# Altium PCB f2.PcbDoc (part 1 of 2)
Units mil, origin at the board's own origin, x right, y up, seen from the top; angles counter-clockwise.
Board outline 2023.27 x 874.02 mil, 6 copper layers (Top Layer, layer2, flex_top, flex_bottom, layer5, Bottom Layer), stack 57.4 mil thick; 105 components, 82 nets, 465 pads, 108 vias.
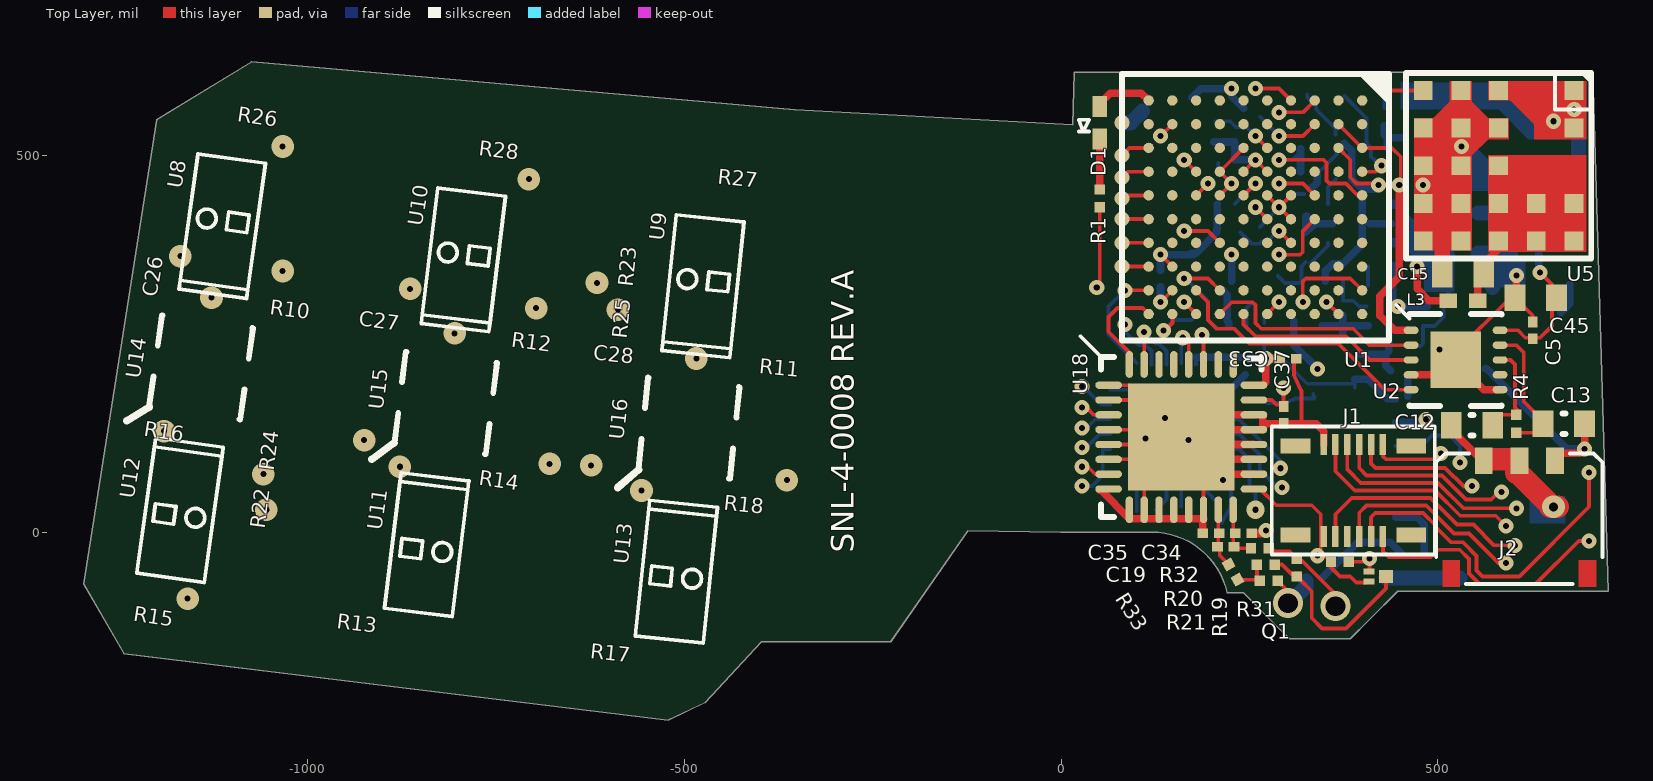
[diagram p0: Top Layer view]
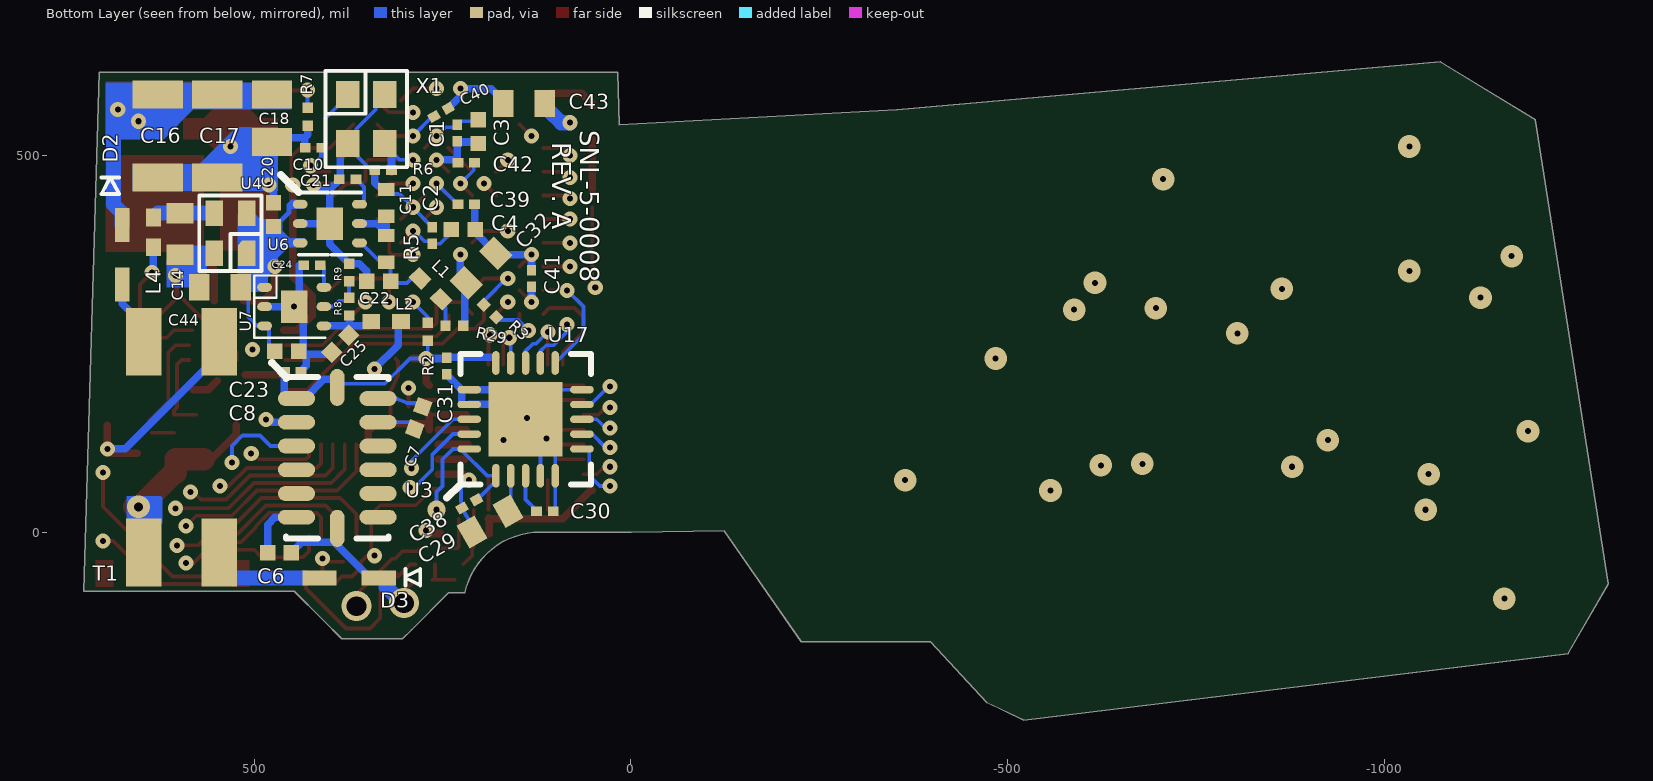
[diagram p1: Bottom Layer view, seen from below]
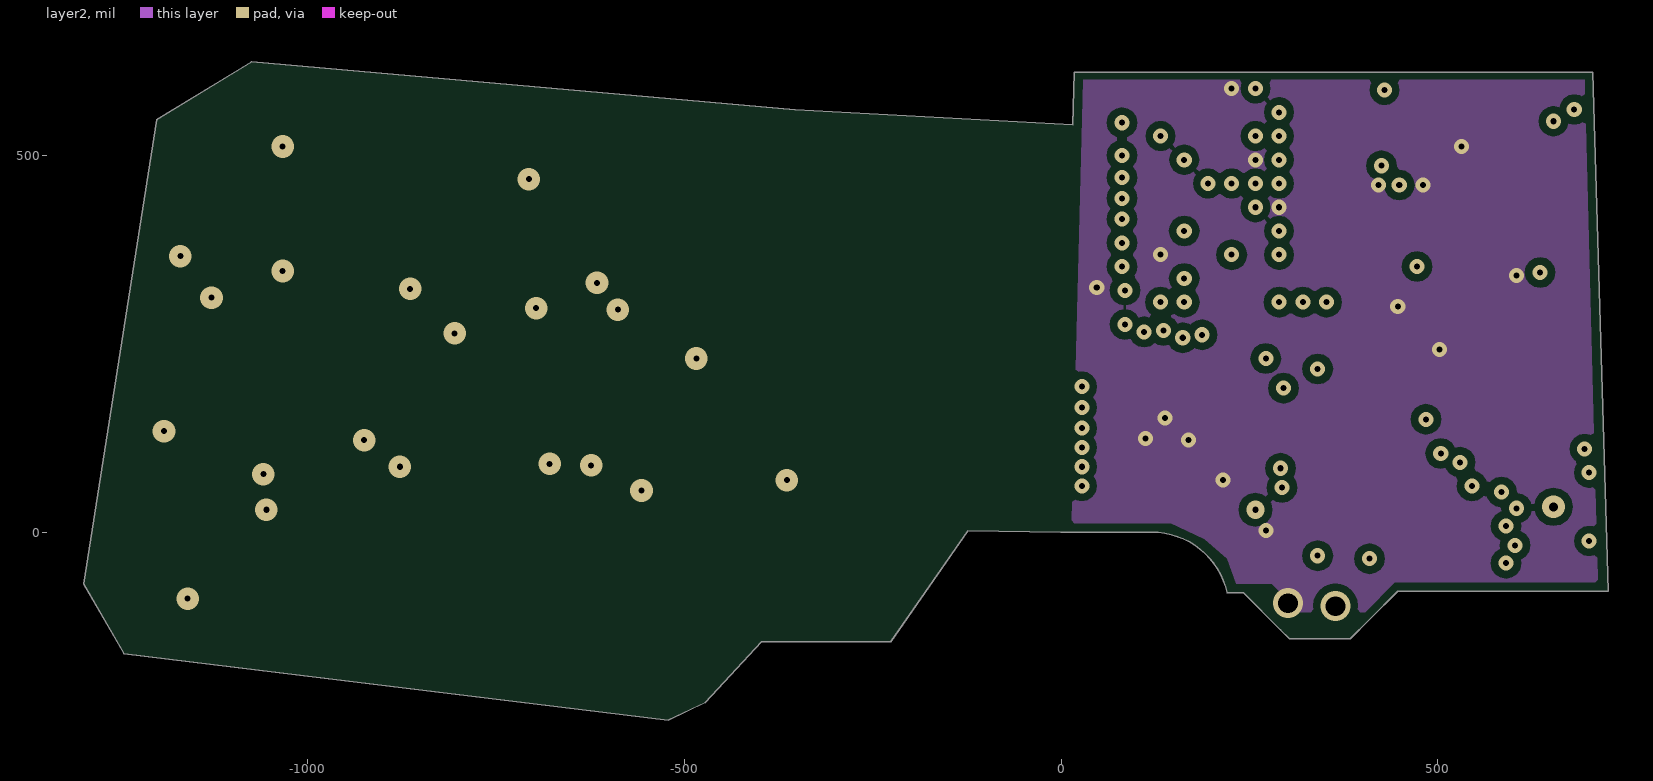
[diagram p2: layer2]
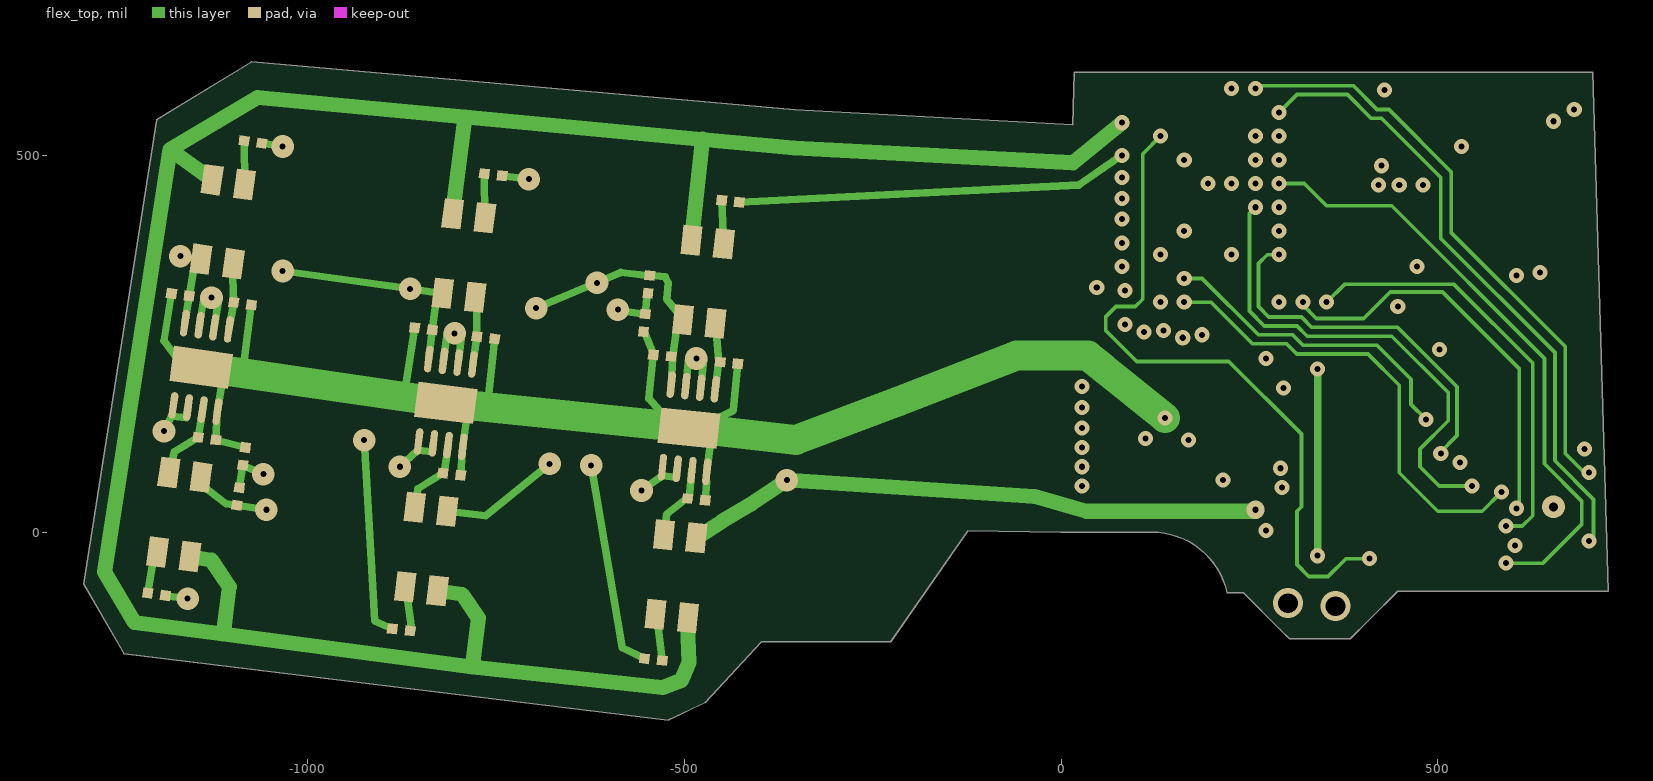
[diagram p3: flex_top]
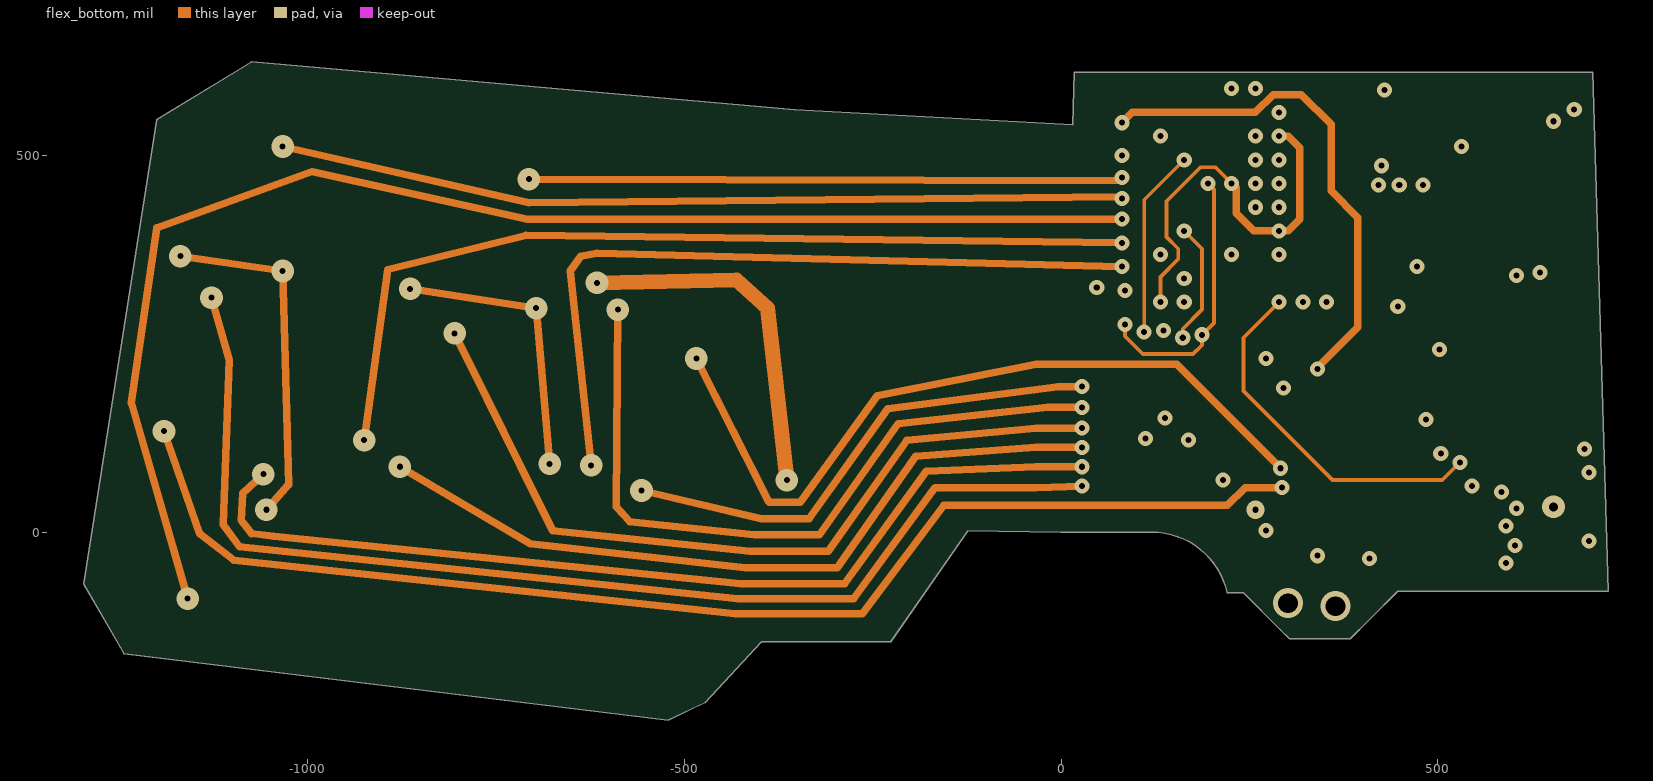
[diagram p4: flex_bottom]
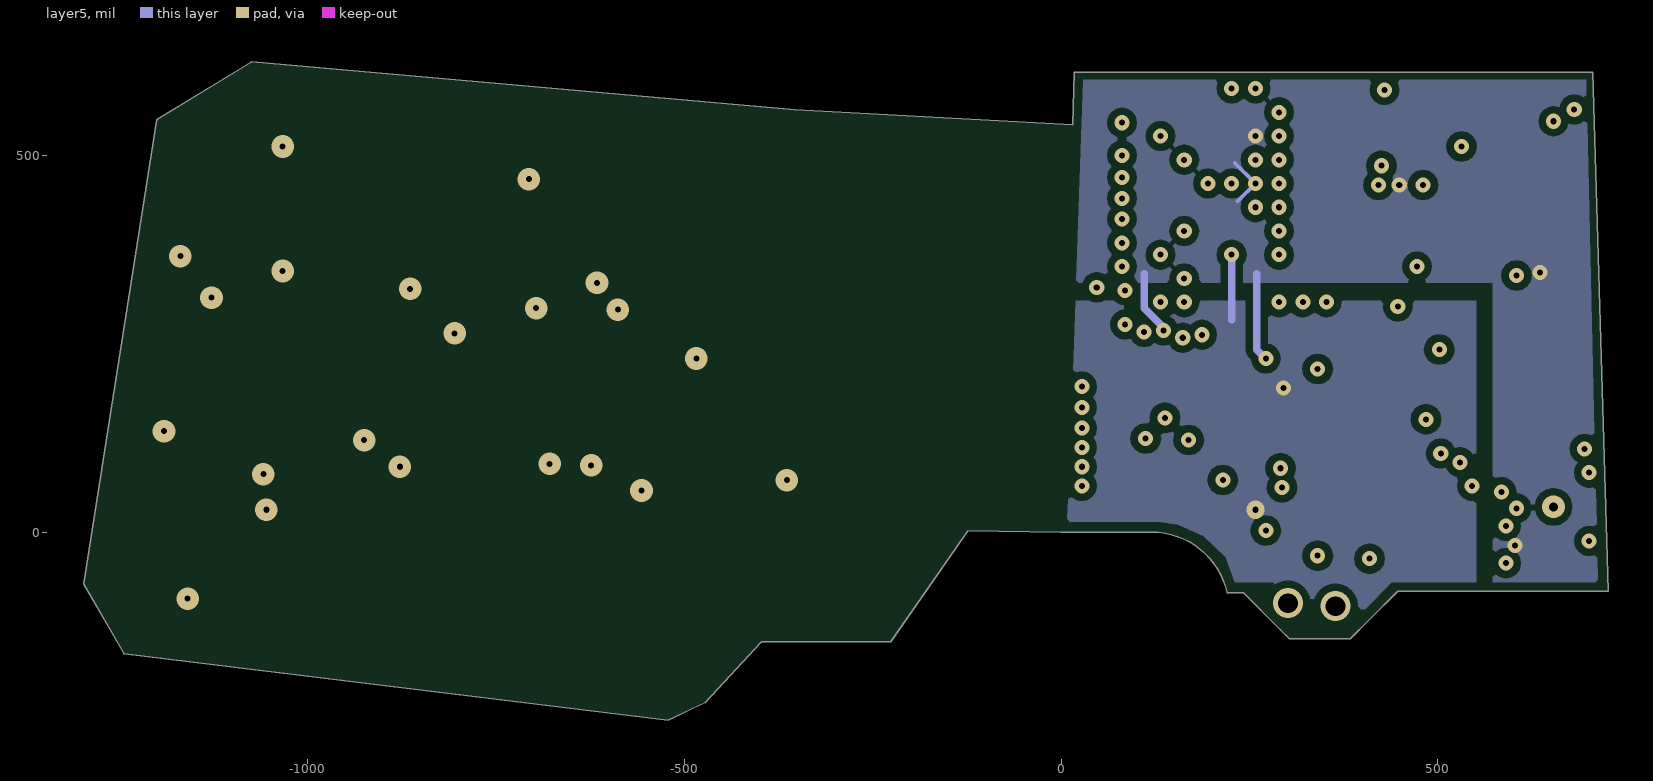
[diagram p5: layer5]

## Layer stack, top to bottom
Top Layer: signal copper 1.4
Dielectric: core 15.5, FR-4, Dk 4.8
layer2: signal copper 1.4
Dielectric: prepreg 3.4, FR-4, Dk 4.8
flex_top: signal copper 0.7
Dielectric: core 12.6, FR-4, Dk 4.8
flex_bottom: signal copper 0.7
Dielectric: prepreg 3.4, FR-4, Dk 4.8
layer5: signal copper 1.4
Dielectric: core 15.5, FR-4, Dk 4.8
Bottom Layer: signal copper 1.4

## Board outline
-1244.09,-161.42 -521.65,-250 -472.44,-226.38 -397.64,-145.67 -226.38,-145.67 -123.81,1.47 -0.8,-0.23 120.3,-0.23 cw(c120.32,-102.7) 220.4,-80.72 220.47,-80.71 242.13,-80.71 291.34,-129.92 303.15,-141.73 383.86,-141.73 409.45,-116.14 446.85,-78.74 726.03,-78.94 705.57,610.01 17.32,610.01 15.25,540.3 -353.27,560.41 -1074.8,624.02 -1200.79,547.24 -1297.24,-68.9

## Design rules (kind name [scope] priority, off if disabled: settings)
Clearance Clearance_layer2__gnd [InNamedPolygon('layer2__gnd')] p1: gap=10
Clearance Clearance_layer5__3v3 [InNamedPolygon('layer5__3v3')] p2: gap=10
Clearance Clearance_layer5__4v7 [InNamedPolygon('layer5__4v7')] p3: gap=10
Clearance [All] p4: gap=5
ComponentClearance [All] p1: gap=1 collisioncheckmode=3 verticalgap=1 showdistances=FALSE
MinimumSolderMaskSliver [All] p1: minsoldermaskwidth=1
PasteMaskExpansion [All] p1: expansion=-1
PolygonConnect [All] p1: connectstyle=Direct reliefconductorwidth=10 reliefentries=4 polygonreliefangle="90 Angle" airgapwidth=10
RoutingVias [All] p1: holewidth=8 width=20 viastyle="Through Hole" minholewidth=8 minwidth=20 maxholewidth=28 maxwidth=40
SilkToSilkClearance [All] p1: silktosilkclearance=1
SilkscreenOverComponentPads [All] p1: minsilkscreentomaskgap=1
SolderMaskExpansion [All] p1: expansion=3
Width [All] p1: maxlimit=40 minlimit=5 preferedwidth=5
23 further rules are at their usual default settings.

## Classes and differential pairs
component class analog: C26 C27 C28 C29 C30 C31 C37 R10 R11 R12 R13 R14 R15 R16 R17 R18 R26 R27 R28 U8 U9 U10 U11 U12 U13 U14 U15 U16 U17
component class mcu: C1 C2 C3 C4 C5 C6 C7 C8 C10 C11 C39 C40 C41 C42 D1 J1 R1 R2 R3 U1 U2 U3 X1
component class bias_tee: C12 C13 C14 C15 C16 C17 C18 C20 C21 C22 C23 C24 C25 C32 C43 C44 C45 D2 D3 J2 L1 L2 L3 L4 R4 R5 R6 R7 R8 R9 R29 T1 U4 U5 U6 U7
component class strain: C19 C33 C34 C35 C38 Q1 R19 R20 R21 R22 R23 R24 R25 R31 R32 R33 U18

## Components (designator, comment, footprint, x,y, rotation, side; value= is the part's Value field where it differs from the comment)
C1 "CAP 100nF 6.3V 0201(0603)" CAPC0201(0603)33_L 230.32,529.53 r90 bottom
C2 "CAP 100nF 6.3V 0201(0603)" CAPC0201(0603)33_L 263.78,393.7 r270 bottom
C3 "CAP 2.2uF 10V 0402(1005)" CAPC0402(1005)60_L 202.76,531.5 r90 bottom
C4 "CAP 2.2uF 10V 0402(1005)" CAPC0402(1005)60_L 222.44,401.57 r0 bottom
C5 "CAP 100nF 6.3V 0201(0603)" CAPC0201(0603)33_L 625.98,267.72 r90 top
C6 "CAP 4.7uF 6.3V 0402(1005)" CAPC0402(1005)60_L 466.54,-27.56 r0 bottom
C7 "CAP 220nF 16V 0402(1005)" CAPC0402(1005)60_L 281.5,151.57 r110 bottom
C8 "CAP 100nF 6.3V 0201(0603)" CAPC0201(0603)33_L 448.82,212.6 r0 bottom
C10 "CAP 10pF 10V 0201(0603)" CAPC0201(0603)33_L 421.26,509.84 r180 bottom
C11 "CAP 10pF 10V 0201(0603)" CAPC0201(0603)33_L 328.74,480.31 r180 bottom
C12 "CAP 1uF 50V 0603(1608)" CAPC0603(1608)100_L 545.28,141.73 r0 top
C13 "CAP 1uF 50V 0603(1608)" CAPC0603(1608)100_L 667.32,143.7 r180 top
C14 "CAP 10uF 10V 0603(1608)" CAPC0603(1608)100_L 598.43,395.67 r90 bottom
C15 "CAP 10uF 10V 0603(1608)" CAPC0603(1608)100_L 533.46,342.52 r0 top
C16 "CAP 10uF 50V 1206(3216)" CAPC1206(3216)190_L 627.95,525.59 r90 bottom
C17 "CAP 10uF 50V 1206(3216)" CAPC1206(3216)190_L 549.21,525.59 r90 bottom
C18 "CAP 2.2uF 50V 0805(2012)" CAPC0805(2012)145_L 476.38,549.21 r270 bottom
C19 "CAP 100nF 10V 0201(0603)" CAPC0201(0603)33_L 218.5,-19.69 r180 top
C20 "CAP 1uF 10V 0402(1005)" CAPC0402(1005)60_L 474.41,421.26 r270 bottom
C21 "CAP 100nF 10V 0201(0603)" CAPC0201(0603)33_L 375.98,468.5 r180 bottom
C22 "CAP 2.2uF 10V 0402(1005)" CAPC0402(1005)60_L 334.65,332.68 r180 bottom
C23 "CAP 1uF 10V 0402(1005)" CAPC0402(1005)60_L 456.69,240.16 r0 bottom
C24 "CAP 100nF 10V 0201(0603)" CAPC0201(0603)33_L 423.23,354.33 r180 bottom
C25 "CAP 2.2uF 10V 0402(1005)" CAPC0402(1005)60_L 385.83,250 r135 bottom
C26 "CAP 100nF 10V 0201(0603)" FLEX_0201 -1169.29,314.96 r352 top
C27 "CAP 100nF 10V 0201(0603)" FLEX_0201 -846.46,269.69 r353 top
C28 "CAP 100nF 10V 0201(0603)" FLEX_0201 -529.53,234.25 r354 top
C29 "CAP 10uF 10V 0603(1608)" CAPC0603(1608)100_L 187.01,13.78 r150 bottom
C30 "CAP 100nF 10V 0201(0603)" CAPC0201(0603)33_L 114.17,27.56 r0 bottom
C31 "CAP 100nF 10V 0201(0603)" CAPC0201(0603)33_L 244.09,220.47 r90 bottom
C32 "CAP 10uF 10V 0603(1608)" CAPC0603(1608)100_L 198.82,350.39 r315 bottom
C33 "CAP 100nF 10V 0201(0603)" CAPC0201(0603)33_L 301.18,230.31 r180 top
C34 "CAP 10nF 10V 0201(0603)" CAPC0201(0603)33_L 242.13,-1.97 r180 top
C35 "CAP 10nF 10V 0201(0603)" CAPC0201(0603)33_L 198.82,-1.97 r0 top
C37 "CAP 100nF 10V 0201(0603)" CAPC0201(0603)33_L 295.28,155.51 r90 top
C38 "CAP 100nF 10V 0201(0603)" CAPC0201(0603)33_L 214.57,37.4 r150 bottom
C39 "CAP 100nF 6.3V 0201(0603)" CAPC0201(0603)33_L 218.5,435.04 r0 bottom
C40 "CAP 100nF 6.3V 0201(0603)" CAPC0201(0603)33_L 251.97,557.09 r330 bottom
C41 "CAP 100nF 6.3V 0201(0603)" CAPC0201(0603)33_L 131.89,336.61 r270 bottom
C42 "CAP 100nF 6.3V 0201(0603)" CAPC0201(0603)33_L 218.5,490.16 r180 bottom
C43 "CAP 10uF 10V 0603(1608)" CAPC0603(1608)100_L 141.73,568.9 r180 bottom
C44 "CAP 10uF 10V 0603(1608)" CAPC0603(1608)100_L 545.28,324.8 r180 bottom
C45 "CAP 10uF 10V 0603(1608)" CAPC0603(1608)100_L 629.92,311.02 r0 top
D1 "LED2" DIOM1005X05L 51.18,543.31 r270 top
D2 "Diode" SOD-323F 675.2,368.11 r90 bottom
D3 "Diode" SOD-323F 374.02,-61.02 r0 bottom
J1 "" MOLEX-51338-9974 387.8,55.12 r270 top
J2 "JST_ACH_3" JST_ACH_3 608.27,76.77 r90 top
L1 "Inductor" 0402-A 265.75,322.83 r225 bottom
L2 "Inductor" 0402-A 324.8,279.53 r180 bottom
L3 "Inductor" 0402-A 533.46,307.09 r180 top
L4 "Inductor" 0402-A 633.86,397.64 r270 bottom
Q1 "MOSFET-P" diodes_inc_dfn_0806 415.35,-59.06 r270 top
R1 "330R 5% 0201(0603)" RESC0201(0603)_L 51.18,442.91 r90 top
R2 "10K 1% 0201(0603)" RESC0201(0603)_L 269.69,265.75 r270 bottom
R3 "10K 1% 0201(0603)" RESC0201(0603)_L 187.01,293.31 r225 bottom
R4 "120R 5% 0201(0603)" RESC0201(0603)_L 604.33,143.7 r270 top
R5 "180K 1% 0402(1005)" RESC0402(1005)_L 324.8,375.98 r270 bottom
R6 "64K9 1% 0402(1005)" RESC0402(1005)_L 324.8,437.01 r270 bottom
R7 "165K 1% 0201(0603)" RESC0201(0603)_L 429.13,551.18 r270 bottom
R8 "113K 1% 0201(0603)" RESC0201(0603)_L 374.02,299.21 r270 bottom
R9 "68K1 1% 0201(0603)" RESC0201(0603)_L 374.02,344.49 r270 bottom
R10 "68.1K 1% 0201(0603)" FLEX_0201 -1086.61,303.15 r352 top
R11 "68.1K 1% 0201(0603)" FLEX_0201 -440.94,224.41 r354 top
R12 "68.1K 1% 0201(0603)" FLEX_0201 -763.78,257.87 r353 top
R13 "523R 1% 0201(0603)" FLEX_0201 -875.98,-129.92 r353 top
R14 "68.1K 1% 0201(0603)" FLEX_0201 -809.05,76.77 r353 top
R15 "523R 1% 0201(0603)" FLEX_0201 -1200.79,-82.68 r172 top
R16 "68.1K 1% 0201(0603)" FLEX_0201 -1133.86,124.02 r352 top
R17 "523R 1% 0201(0603)" FLEX_0201 -541.34,-169.29 r354 top
R18 "68.1K 1% 0201(0603)" FLEX_0201 -484.25,43.31 r354 top
R19 "330R 5% 0201(0603)" RESC0201(0603)_L 312.99,-47.24 r270 top
R20 "" RESC0201(0603)_L 271.65,-43.31 r0 top
R21 "" RESC0201(0603)_L 275.59,-64.96 r180 top
R22 "THERMISTOR_0201" FLEX_0201 -1092.52,47.24 r82 top
R23 "THERMISTOR_0201" FLEX_0201 -547.24,328.74 r264 top
R24 "68K1 1% 0201(0603)" FLEX_0201 -1084.65,100.39 r262 top
R25 "68K1 1% 0201(0603)" FLEX_0201 -553.15,277.56 r84 top
R26 "523R 1% 0201(0603)" FLEX_0201 -1072.83,517.72 r172 top
R27 "523R 1% 0201(0603)" FLEX_0201 -438.98,438.98 r174 top
R28 "523R 1% 0201(0603)" FLEX_0201 -753.94,474.41 r173 top
R29 "10R 5% 0201(0603)" RESC0201(0603)_L 234.25,273.62 r180 bottom
R31 "68K1 1% 0201(0603)" RESC0201(0603)_L 370.08,-39.37 r180 top
R32 "120R 5% 0201(0603)" RESC0201(0603)_L 263.78,-21.65 r0 top
R33 "120R 5% 0201(0603)" RESC0201(0603)_L 228.35,-53.15 r120 top
T1 "epcos_choke_b82790c" epcos_choke_b82790x 716.54,332.68 r270 bottom
U1 "ATSAM3S4CA-CU" TFBGA100 257.87,431.1 r270 top
U2 "MAX13431E" QFN50P300X300X80-10L 523.62,228.35 r270 top
U3 "LSM303DLHCTR" LGA14-3X5X1_M 389.76,98.43 r180 bottom
U4 "LXDC2HL" LXDC2Hx 509.84,370.08 r270 bottom
U5 "LTM8020" LTM8020 580.71,486.22 r270 top
U6 "MIC5319" MIC5319 399.61,409.45 r180 bottom
U7 "MIC5319" MIC5319 446.85,299.21 r180 bottom
U8 "EE_SY199" EE_SY199 -1141.73,362.2 r82 top locked
U9 "EE_SY199" EE_SY199 -501.97,281.5 r84 top locked
U10 "EE_SY199" EE_SY199 -820.87,316.93 r83 top locked
U11 "EE_SY199" EE_SY199 -814.96,27.56 r263 top locked
U12 "EE_SY199" EE_SY199 -1141.73,72.83 r262 top locked
U13 "EE_SY199" EE_SY199 -484.25,-7.87 r264 top locked
U14 "OPA2320AIDRGT" OPAMP_DUAL_3X3 -1141.73,218.5 r82 top
U15 "OPA2320AIDRGT" OPAMP_DUAL_3X3 -816.93,171.26 r83 top
U16 "OPA2320AIDRGT" OPAMP_DUAL_3X3 -494.09,137.8 r84 top
U17 "AD7699BCPZRL7" CP-20-4_L 139.76,149.61 r90 bottom
U18 "AD7194BCPZ" CP-32-11_N 159.45,125.98 r0 top
X1 "CRYSTAL" CRYSTAL_2_2.5 391.73,598.43 r270 bottom

## Footprints (in the part's own frame and the unit in brackets; to place one, negate y for a bottom-side part, rotate by r counter-clockwise, add the part's x,y. Pads: shape width x height; smd on the part's side, far side on the other; paste and mask are expansions set on the pad)
0402-A [mm] "Chip Inductor, Body 1.0x0.5mm, IPC High Density"
  rect 0.6x0.5 smd: 1(-0.5,0) 2(0.5,0)
  body extent -0.55,-0.3 0.55,0.3, height 0.55
CAPC0201(0603)33_L [mm] "Chip Capacitor, Body 0.6x0.3mm, Height 0.33mm, IPC High Density"
  rect 0.36x0.32 smd: 1(-0.28,0) 2(0.28,0)
  body extent -0.32,-0.17 0.32,0.17, height 0.33
CAPC0402(1005)60_L [mm] "Chip Capacitor, Body 1.0x0.5mm, Height 0.6mm, IPC High Density"
  rect 0.52x0.52 smd: 1(-0.4,0) 2(0.4,0)
  body extent -0.55,-0.3 0.55,0.3, height 0.6
CAPC0603(1608)100_L [mm] "Chip Capacitor, Body 1.6x0.8mm, Height 1.0mm, IPC High Density"
  rect 0.7x0.9 smd: 1(-0.7,0) 2(0.7,0)
  silkscreen extent -0.05,-0.35 0.05,0.35, body extent -0.87,-0.47 0.88,0.48, height 1
CAPC0805(2012)145_L [mm] "Chip Capacitor, Body 2.0x1.2mm, Height 1.45mm, IPC High Density"
  rect 0.95x1.35 smd: 1(-0.8,0) 2(0.8,0)
  body extent -1.1,-0.72 1.1,0.72, height 1.45
CAPC1206(3216)190_L [mm] "Chip Capacitor, Body 3.2x1.6mm, Height 1.9mm, IPC High Density"
  rect 0.95x1.7 smd: 1(-1.4,0) 2(1.4,0)
  body extent -1.7,-0.9 1.7,0.9, height 1.9
CP-20-4_L [mm] "QFN, 20-Leads, Body 4x4mm, Pitch 0.5mm, Thermal Pad 2.5x2.5mm, IPC High Density"
  oval 0.8x0.25 smd: 1(-1.9,1) 2(-1.9,0.5) 3(-1.9,0) 4(-1.9,-0.5) 5(-1.9,-1) 11(1.9,-1) 12(1.9,-0.5) 13(1.9,0) 14(1.9,0.5) 15(1.9,1)
  oval 0.25x0.8 smd: 6(-1,-1.9) 7(-0.5,-1.9) 8(0,-1.9) 9(0.5,-1.9) 10(1,-1.9) 16(1,1.9) 17(0.5,1.9) 18(0,1.9) 19(-0.5,1.9) 20(-1,1.9)
  rect 2.5x2.5 smd paste-0.508: 21(0,0)
  silkscreen extent -2.2,-2.2 2.2,2.2, body extent -2.05,-2.05 2.05,2.05, height 1
CP-32-11_N [mm] "QFN, 32-Leads, Body 5x5mm, Pitch 0.5mm, Thermal Pad 3.6x3.6mm, IPC Medium Density"
  oval 0.9x0.25 smd: 1(-2.45,1.75) 2(-2.45,1.25) 3(-2.45,0.75) 4(-2.45,0.25) 5(-2.45,-0.25) 6(-2.45,-0.75) 7(-2.45,-1.25) 8(-2.45,-1.75) 17(2.45,-1.75) 18(2.45,-1.25) 19(2.45,-0.75) 20(2.45,-0.25) 21(2.45,0.25) 22(2.45,0.75) 23(2.45,1.25) 24(2.45,1.75)
  oval 0.25x0.9 smd: 9(-1.75,-2.45) 10(-1.25,-2.45) 11(-0.75,-2.45) 12(-0.25,-2.45) 13(0.25,-2.45) 14(0.75,-2.45) 15(1.25,-2.45) 16(1.75,-2.45) 25(1.75,2.45) 26(1.25,2.45) 27(0.75,2.45) 28(0.25,2.45) 29(-0.25,2.45) 30(-0.75,2.45) 31(-1.25,2.45) 32(-1.75,2.45)
  rect 3.6x3.6 smd paste-0.762: 33(0,0)
  silkscreen extent -2.7,-2.7 2.7,2.7, body extent -2.55,-2.55 2.55,2.55, height 1
CRYSTAL_2_2.5 [mm]
  rect 0.9x0.8 smd: 1(0.45,0.4) 2(2.1,0.4) 3(2.1,1.65) 4(0.45,1.65)
  silkscreen extent -0.35,-0.35 2.9,2.4, body extent 0.05,0.05 2.5,2, height 0.5
diodes_inc_dfn_0806 [mm]
  rect 0.45x0.475 smd: D(0,0.4)
  rect 0.2x0.375 smd: G(-0.175,-0.175) S(0.175,-0.175)
  body extent -0.3,-0.28 0.3,0.53, height 0.4
DIOM1005X05L [mm] "Molded Diode, 2-Leads, Body 1.0x0.5mm, IPC High Density"
  rect 0.7x0.5 smd: 1(-0.55,0) 2(0.55,0)
  body extent -0.5,-0.25 0.5,0.25, height 0.5
EE_SY199 [mm]
  rect 1x0.65 on Mid2: A(2.7,0) C(0,0) E(0,-1.1) K(2.7,-1.1)
  silkscreen extent -1.1,-1.7 3.5,0.6, body extent -0.2,-1.4 3,0.3, height 1.1
epcos_choke_b82790x [mil]
  rect 90x47.24 smd: 1(80,170) 2(360,170) 3(360,70) 4(80,70)
  body extent 43,2 397,238, height 205
FLEX_0201 [mm] "Chip Resistor, Body 0.6x0.3mm, IPC High Density"
  rect 0.35x0.35 on Mid2 paste-10 mask-10: 1(-0.3,0) 2(0.3,0)
  body extent -0.31,-0.16 0.31,0.16, height 0.3
JST_ACH_3 [mm]
  rect 0.9x0.6 smd: 1(0.45,1.2) 2(0.45,0) 3(0.45,-1.2)
  Top Layer region: -3.8,2 -2.9,2 -2.9,2.6 -3.8,2.6
  Top Layer region: -3.8,-2.6 -2.9,-2.6 -2.9,-2 -3.8,-2
  silkscreen extent -3.7,-2.8 0.7,2.8, body extent -3.65,-2.7 0.65,2.7, height 1.4
LGA14-3X5X1_M [mm] "PQFN, 14-Leads, Body 3x5mm, Pitch 0.8mm, IPC Low Density"
  oval 1.25x0.5 smd: 1(-1.375,2) 2(-1.375,1.2) 3(-1.375,0.4) 4(-1.375,-0.4) 5(-1.375,-1.2) 6(-1.375,-2) 8(1.375,-2) 9(1.375,-1.2) 10(1.375,-0.4) 11(1.375,0.4) 12(1.375,1.2) 13(1.375,2)
  oval 0.5x1.25 smd: 7(0,-2.375) 14(0,2.375)
  silkscreen extent -1.72,-2.72 1.73,2.73, body extent -1.57,-2.57 1.58,2.58, height 1
LTM8020 [mil] "LTM8020"
  rect 25x25 smd: A1(-100,100) A2(-50,100) A4(50,100) A5(100,100) B4(50,50) B5(100,50) C1(-100,0) C2(-50,0) C3(0,0) C4(50,0) C5(100,0) D1(-100,-50) D2(-50,-50) D3(0,-50) D4(50,-50) D5(100,-50) E1(-100,-100) E2(-50,-100) E3(0,-100) E4(50,-100) E5(100,-100)
  silkscreen extent -123,-123 123,123, body extent -123,-123 123,123, height 95
LXDC2Hx [mm]
  oct 0.85x0.6 smd: 1(0,0)
  rect 0.85x0.3 smd: 1(0,0.15)
  rect 0.45x0.6 smd: 1(0.2,0)
  rect 0.85x0.6 smd: 2(-1.35,0) 3(-1.35,-1.1) 4(0,-1.1)
  silkscreen extent -1.95,-1.6 0.6,0.5, body extent -1.9,-1.55 0.55,0.45, height 1.1
MIC5319 [mm]
  oval 0.5x0.3 smd: 1(-1,0.65) 2(-1,0) 3(-1,-0.65) 4(1,-0.65) 5(1,0) 6(1,0.65)
  rect 0.9x1.1 smd: 7(0,0)
  silkscreen extent -1.05,-1.05 1.05,1.05, body extent -1.05,-1.05 1.05,1.05, height 0.9
MOLEX-51338-9974 [mm] "MOLEX-51338-9974"
  rect 0.7x0.22 smd: 1(-1.55,1) 2(1.55,1) 3(-1.55,0.6) 4(1.55,0.6) 5(-1.55,0.2) 6(1.55,0.2) 7(-1.55,-0.2) 8(1.55,-0.2) 9(-1.55,-0.6) 10(1.55,-0.6) 11(-1.55,-1) 12(1.55,-1)
  rect 0.5x1 smd: MNT(-1.5,1.95) MNT(-1.5,-1.95) MNT(1.5,1.95) MNT(1.5,-1.95)
  silkscreen extent -2.16,-2.75 2.16,2.75, body extent -1.7,-2.75 1.7,2.75, height 1.42
OPAMP_DUAL_3X3 [mm]
  oval 0.9x0.25 on Mid2 paste-10 mask-10: 1(-1.4,0.75) 2(-1.4,0.25) 3(-1.4,-0.25) 4(-1.4,-0.75) 5(1.4,-0.75) 6(1.4,-0.25) 7(1.4,0.25) 8(1.4,0.75)
  rect 1.2x2 on Mid2 paste-10 mask-10: 9(0,0)
  silkscreen extent -1.55,-1.55 1.55,1.55, body extent -1.55,-1.55 1.55,1.55, height 0.8
QFN50P300X300X80-10L [mm] "QFN, 10-Leads, Body 3.1x3.1mm (max), Pitch 0.50mm, IPC High Density"
  oval 0.25x0.5 smd: 1(-1,-1.5) 2(-0.5,-1.5) 3(0,-1.5) 4(0.5,-1.5) 5(1,-1.5) 6(1,1.5) 7(0.5,1.5) 8(0,1.5) 9(-0.5,1.5) 10(-1,1.5)
  rect 1.905x1.7 smd paste-0.381: 11(0,0)
  silkscreen extent -1.55,-1.55 1.55,1.55, body extent -1.55,-1.55 1.55,1.55, height 0.8
RESC0201(0603)_L [mm] "Chip Resistor, Body 0.6x0.3mm, IPC High Density"
  rect 0.35x0.35 smd: 1(-0.3,0) 2(0.3,0)
  body extent -0.31,-0.16 0.31,0.16, height 0.3
RESC0402(1005)_L [mm] "Chip Resistor, Body 1.0x0.5mm, IPC High Density"
  rect 0.45x0.55 smd: 1(-0.45,0) 2(0.45,0)
  body extent -0.52,-0.27 0.53,0.28, height 0.4
SOD-323F [mm] "SOD-323F"
  rect 1.15x0.5 smd: 1(-1,0) 2(1,0)
  body extent -0.9,-0.67 0.9,0.67, height 0.8
TFBGA100 [mm] "BGA, 100-Leads, Body 9x9mm, Pitch 0.8mm"
  round 0.35 smd: A1(-3.6,3.6) A2(-2.8,3.6) A3(-2,3.6) A4(-1.2,3.6) A5(-0.4,3.6) A6(0.4,3.6) A7(1.2,3.6) A8(2,3.6) A9(2.8,3.6) A10(3.6,3.6) B1(-3.6,2.8) B2(-2.8,2.8) B3(-2,2.8) B4(-1.2,2.8) B5(-0.4,2.8) B6(0.4,2.8) B7(1.2,2.8) B8(2,2.8) B9(2.8,2.8) B10(3.6,2.8) C1(-3.6,2) C2(-2.8,2) C3(-2,2) C4(-1.2,2) C5(-0.4,2) C6(0.4,2) C7(1.2,2) C8(2,2) C9(2.8,2) C10(3.6,2) D1(-3.6,1.2) D2(-2.8,1.2) D3(-2,1.2) D4(-1.2,1.2) D5(-0.4,1.2) D6(0.4,1.2) D7(1.2,1.2) D8(2,1.2) D9(2.8,1.2) D10(3.6,1.2) E1(-3.6,0.4) E2(-2.8,0.4) E3(-2,0.4) E4(-1.2,0.4) E5(-0.4,0.4) E6(0.4,0.4) E7(1.2,0.4) E8(2,0.4) E9(2.8,0.4) E10(3.6,0.4) F1(-3.6,-0.4) F2(-2.8,-0.4) F3(-2,-0.4) F4(-1.2,-0.4) F5(-0.4,-0.4) F6(0.4,-0.4) F7(1.2,-0.4) F8(2,-0.4) F9(2.8,-0.4) F10(3.6,-0.4) G1(-3.6,-1.2) G2(-2.8,-1.2) G3(-2,-1.2) G4(-1.2,-1.2) G5(-0.4,-1.2) G6(0.4,-1.2) G7(1.2,-1.2) G8(2,-1.2) G9(2.8,-1.2) G10(3.6,-1.2) H1(-3.6,-2) H2(-2.8,-2) H3(-2,-2) H4(-1.2,-2) H5(-0.4,-2) H6(0.4,-2) H7(1.2,-2) H8(2,-2) H9(2.8,-2) H10(3.6,-2) J1(-3.6,-2.8) J2(-2.8,-2.8) J3(-2,-2.8) J4(-1.2,-2.8) J5(-0.4,-2.8) J6(0.4,-2.8) J7(1.2,-2.8) J8(2,-2.8) J9(2.8,-2.8) J10(3.6,-2.8) K1(-3.6,-3.6) K2(-2.8,-3.6) K3(-2,-3.6) K4(-1.2,-3.6) K5(-0.4,-3.6) K6(0.4,-3.6) K7(1.2,-3.6) K8(2,-3.6) K9(2.8,-3.6) K10(3.6,-3.6)
  silkscreen extent -4.5,-4.5 4.5,4.5, body extent -4.5,-4.5 4.5,4.5, height 1.2

## Part data
C1 C2 C5 C8 C39 C40 C41 C42: library part CMP-1033-00660-1, "CAP 100nF 6.3V ±10% 0201 (0603 Metric) Thickness 0.33mm SMD"
C3 C4 C22 C25: library part CMP-1034-02127-1, "CAP 2.2uF 10V ±10% 0402 (1005 Metric) Thickness 0.6mm SMD"
C6: library part CMP-1034-02136-1, "CAP 4.7uF 6.3V ±10% 0402 (1005 Metric) Thickness 0.6mm SMD"
C7: library part CMP-1034-02089-1, "CAP 220nF 16V ±10% 0402 (1005 Metric) Thickness 0.6mm SMD"
C10 C11: library part CMP-1033-00354-1, "CAP 10pF 10V ±10% 0201 (0603 Metric) Thickness 0.33mm SMD"
C12 C13: library part CMP-1035-02745-1, "CAP 1uF 50V ±10% 0603 (1608 Metric) Thickness 1mm SMD"
C14 C15 C29 C32 C43 C44 C45: library part CMP-1035-02799-1, "CAP 10uF 10V ±10% 0603 (1608 Metric) Thickness 1mm SMD"
C16 C17: library part CMP-1037-04982-1, "CAP 10uF 50V ±10% 1206 (3216 Metric) Thickness 1.9mm SMD"
C18: library part CMP-1036-04844-1, "CAP 2.2uF 50V ±10% 0805 (2012 Metric) Thickness 1.45mm SMD"
C19 C21 C24 C26 C27 C28 C30 C31 C33 C37 C38: library part CMP-1033-00662-1, "CAP 100nF 10V ±10% 0201 (0603 Metric) Thickness 0.33mm SMD"
C20 C23: library part CMP-1034-02116-1, "CAP 1uF 10V ±10% 0402 (1005 Metric) Thickness 0.6mm SMD"
C34 C35: library part CMP-1033-00638-1, "CAP 10nF 10V ±5% 0201 (0603 Metric) Thickness 0.33mm SMD"
D1: "Typical RED, GREEN, YELLOW, AMBER GaAs LED"
D2 D3: "Default Diode"
J1: library part "Header 6X2", "Header, 6-Pin, Dual row"
Q1: "P-Channel MOSFET"
R1 R19: library part CMP-1010-00062-1, "330R 0.05W 5% 0201 (0603 Metric)  SMD"
R2 R3: library part CMP-1010-00529-1, "10K 0.05W 1% 0201 (0603 Metric)  SMD"
R4 R32 R33: library part CMP-1010-00052-1, "120R 0.05W 5% 0201 (0603 Metric)  SMD"
R5: library part CMP-1011-00763-1, "180K 0.063W 1% 0402 (1005 Metric)  SMD"
R6: library part CMP-1011-00715-1, "64K9 0.063W 1% 0402 (1005 Metric)  SMD"
R7: library part CMP-1010-00665-1, "165K 0.05W 1% 0201 (0603 Metric)  SMD"
R8: library part CMP-1010-00647-1, "113K 0.05W 1% 0201 (0603 Metric)  SMD"
R9 R24 R25 R31: library part CMP-1010-00624-1, "68K1 0.05W 1% 0201 (0603 Metric)  SMD"
R10: library part CMP-1010-00642-1, "100K 0.05W 1% 0201 (0603 Metric)  SMD"
R11 R12 R14 R16 R18: library part CMP-1010-00642-1, "68.1K 0.05W 1% 0201 (0603 Metric)  SMD"
R13 R15 R17 R26 R27 R28: library part CMP-1010-00385-1, "523R 0.05W 1% 0201 (0603 Metric)  SMD"
R20: library part CMP-1010-00062-1
R21: library part CMP-1010-00052-1
R29: library part CMP-1010-00026-1, "10R 0.05W 5% 0201 (0603 Metric)  SMD"
U1: library part CMP-0076-00118-1, "AT91 ARM Cortex-M3 32-bit Microcontroller, 256KB Flash, 48KB SRAM, 16-ch. ADC, 79 User I/Os, 100-Pin BGA, Industrial Grade (-40°C to 85°C), Pb-Free"
U3: library part CMP-0234-00035-1, "Ultra compact high performance e-compass: 3D accelerometer and 3D magnetometer module, -40 to +85°C, LGA-14 (3x5x1), Tape and Reel"
U4: library part MURATA_LXDC2HL
U8 U9 U10 U11 U12 U13: "Omron EE-SY199"
U14 U15 U16: library part OPAMP_DUAL
U17: library part CMP-0313-00572-1, "Octal 16-Bit PulSAR Analog-to-Digital Converter with Serial, SPI Interface, 500KSPS, -40 to +85 degC, CP-20-4, Pb-Free, Reel"
U18: library part CMP-0313-00460-1, "Octal 24-Bit Ultralow Noise Sigma-Delta Analog-to-Digital Converter with Serial, SPI Interface and PGA, 4.8KSPS, -40 to +105 degC, CP-32-11, Pb-Free, Tray"

## Via types
v1: diameter 20, hole 8, Top Layer to Bottom Layer, tented both sides, 79 vias
v2: diameter 30, hole 8, Top Layer to Bottom Layer, tented both sides, 21 vias
v3: diameter 20, hole 8, Top Layer to Bottom Layer, 3 vias
v4: diameter 40, hole 26, Top Layer to Bottom Layer, 2 vias
v5: diameter 30, hole 12, Top Layer to Bottom Layer, tented both sides, 1 vias
v6: diameter 20, hole 8, Top Layer to Bottom Layer, tented bottom, 1 vias
v7: diameter 24, hole 8, Top Layer to Bottom Layer, tented both sides, 1 vias

## Nets (pads, with @x,y where several pads share a name; then routed paths per layer and width w, separated by ;. In a path a pad name is that pad's centre, name@x,y a point inside that pad or via, vN(x,y) a via of type N, cw(c..) or ccw(c..) an arc to the next point about the centre after c; other vN are vias at no path point)
1V8: C2.2 C4.2 C40.2 C41.2 C42.2 U1.C2 U1.D7 U1.F3 U1.G4 U1.G5 U1.J9 | length 875.1
  Top Layer w5: v1(131.89,305.12) U1.J9@147.64,320.87 ; U1.G5@210.63,446.85 v1(226.38,462.6) U1.G4@210.63,478.35 U1.F3@242.13,509.84 ; v1(289.37,399.61) U1.D7@305.12,383.86 ; v1(289.37,525.59) 320.87,525.59 U1.C2@336.61,541.34
  flex_bottom w5: v1(131.89,305.12) 131.89,338.58 155.51,362.2 155.51,375.98 139.76,391.73 139.76,438.98 155.51,454.72 185.04,484.25 204.72,484.25 v1(226.38,462.6)
  flex_bottom w10: v1(226.38,462.6) 232.28,456.69 232.28,423.23 255.91,399.61 v1(289.37,399.61) 301.18,399.61 316.93,415.35 316.93,509.84 301.18,525.59 v1(289.37,525.59)
  Bottom Layer w5: C42.2@208.66,490.16 208.66,480.31 v1(226.38,462.6) ; C4.2@238.19,397.64 253.15,382.68 C2.2@263.78,382.68 265.75,384.65 265.75,385.83 273.62,385.83 v1@285.43,397.64 ; C40.2@263.78,551.18 v1(289.37,525.59)
  Bottom Layer w10: v1(131.89,305.12) C41.2@131.89,325.59
3V3: C1.2 C3.2 C5.1 C8.2 C31.2 C33.2 C39.2 C45.2 J1.10 L4.2 R2.2 R3.2 U1.A3 U1.B2 U1.E3 U1.F5 U1.J10 U2.1 U2.10 U3.1 U3.14 U17.15 U18.24 | length 1767.2
  Top Layer w5: v1@137.8,267.72 147.64,277.56 U1.J10@147.64,289.37 ; U1.F5@242.13,446.85 v1(257.87,462.6) ; v1(257.87,525.59) U1.E3@273.62,509.84 ; J1.10@364.17,-5.91 364.17,23.62 385.67,45.12 490.32,45.12 525.59,9.84 547.24,9.84 574.8,-17.72 v1(602.36,-17.72) v1@604.33,-17.72 ; U1.B2@368.11,541.34 U1.A3@399.61,509.84 438.98,509.84 450.79,498.03 450.79,466.54 v1@444.88,460.63 ; U2.10@582.68,267.72 606.3,267.72 616.14,257.87 635.83,257.87 651.57,273.62 651.57,328.74 v1(635.83,344.49)
  Top Layer w10: U18.24@267.72,194.88 271.65,198.82 v1(271.65,230.31) C33.2@289.37,230.31 ; v1(448.82,460.63) 448.82,338.58 423.23,312.99 423.23,287.4 442.91,267.72 U2.1@460.63,267.72
  layer5 w5: 230.32,490.16 v1(257.87,462.6) 234.25,438.98
  layer5 w10: 110.24,342.52 110.24,297.24 v1@137.8,269.69 ; 259.84,342.52 259.84,242.13 v1(271.65,230.31)
  Bottom Layer w5: v1(135.83,267.72) 149.61,281.5 173.23,281.5 176.69,284.96 R3.2@178.66,284.96 ; U17.15@179.13,222.44 U17.15@179.13,232.28 ; C3.2@204.72,545.28 224.41,545.28 232.28,537.4 246.06,537.4 v1(257.87,525.59) ; C39.2@230.32,435.04 v1(257.87,462.6) ; v1@269.69,232.28 R2.2@269.69,253.94 ; v1(271.65,230.31) 293.31,230.31 326.77,196.85 389.76,196.85 U3.14@389.76,191.93
  Bottom Layer w10: U17.15@179.13,232.28 C31.2@242.13,232.28 ; C31.2@244.09,231.5 245.28,230.31 v1(271.65,230.31) ; U3.14@389.76,202.76 407.48,202.76 433.07,177.17 U3.1@443.9,177.17 ; U3.1@459.84,180.31 C8.2@459.84,208.66 ; L4.2@633.86,377.95 633.86,346.46 v1(635.83,344.49)
3V3_ANALOG: C43.2 J1.12 L2.2 Q1.S R31.2 U8.A U9.A U10.A U11.A U12.A U13.A U18.17 | length 4620
  Top Layer w5: U18.17@255.91,57.09 263.78,57.09 285.43,35.43 332.68,35.43 344.49,23.62 344.49,-29.53 v1@346.46,-31.5 ; v1@350.39,-31.5 R31.2@358.27,-39.37 358.27,-47.24 370.08,-59.06 383.86,-59.06 391.73,-66.93 Q1.S@405.51,-66.93
  flex_top w10: v1@340.55,-29.53 v1(340.55,216.54)
  flex_top w20: U12.A@-1156.53,-32.43 -1127.95,-37.4 -1104.33,-72.83 -1112.2,-133.86 ; U8.A@-1126.94,467.47 -1183.07,507.87 ; U11.A@-827.92,-77.95 -795.28,-82.68 -773.62,-114.17 -781.5,-177.17 ; U10.A@-807.91,422.44 -791.38,550.89 -1066.93,576.77 -1183.07,507.87 ; -791.37,550.89 -476.41,521.31 ; U13.A@-496.06,-124.02 -494.09,-173.23 -503.94,-196.85 -529.53,-206.69 -781.77,-179.23 -1112.44,-135.62 -1230.31,-120.08 -1269.68,-53.15 -1183.07,507.87 ; U9.A@-490.86,387.21 -476.41,521.31 ; -476.38,521.65 -476.41,521.31 ; v1(80.71,543.31) 15.75,490.16 -354.33,509.84 -476.41,521.31
  flex_bottom w10: v1(80.71,543.31) 94.49,557.09 257.87,557.09 281.5,580.71 318.9,580.71 358.27,541.34 358.27,452.76 393.7,417.32 393.7,271.65 v1@339.57,217.52
  Bottom Layer w10: L2.2@309.06,279.53 309.06,248.03 v1(340.55,216.54)
  Bottom Layer w20: v1(80.71,543.31) 92.52,543.31 C43.2@108.27,559.06
  other v1: 340.55,-31.5
4V7_ANALOG: C26.2 C27.2 C28.2 C32.2 C37.2 C38.2 R22.1 R23.1 R29.2 U8.C U9.C U10.C U11.C U12.C U13.C U14.8 U15.8 U16.8 U17.1 U17.20 U18.23 | length 3483.9
  Top Layer w5: U18.23@255.91,175.2 279.53,175.2 285.43,169.29 C37.2@293.31,169.29 ; C37.2@295.28,166.54 v1(295.28,190.94)
  flex_top w10: v2(-1169.29,366.14) U8.C@-1145.67,362.2 ; U14.8@-1163.39,277.56 C26.2@-1157.6,313.32 U8.C@-1151.57,348.43 ; U12.C@-1141.73,62.99 -1108.27,37.4 R22.1@-1094.16,35.55 v2(-1055.12,29.53) ; v2(-1033.46,346.46) v2(-864.17,322.83) U10.C@-824.8,316.93 ; U15.8@-839.52,229.57 -834.86,267.93 -834.81,268.26 U10.C@-828.74,312.99 ; U11.C@-814.96,27.56 -763.78,21.65 v2(-679.13,90.55) ; v2(-696.85,297.24) -616.33,331.15 -584.65,344.49 R23.1@-546.01,340.49 ; R23.1@-545.28,340.55 -525.59,338.58 -521.65,330.71 -523.62,309.06 U9.C@-505.91,287.4 ; U16.8@-517.7,195.7 -515.75,232.28 -515.69,232.73 U9.C@-509.84,275.59
  flex_top w20: U13.C@-484.25,-7.87 -450.79,13.78 -411.42,37.4 v2(-364.17,68.9) -35.43,47.24 33.46,27.56 v7@257.87,27.56
  flex_bottom w10: v2(-1169.29,366.14) v2(-1033.46,346.46) -1025.59,62.99 -1054.98,29.52 v2@-1055.12,27.56 ; v2(-864.17,322.83) v2(-696.85,297.24) v2(-679.13,90.55)
  flex_bottom w20: v2(-616.14,330.71) -431.1,334.65 -389.76,297.24 v2(-364.17,68.9)
  layer5 w10: 226.38,281.5 v1(226.38,368.11)
  Bottom Layer w5: U17.1@179.13,74.8 190.95,74.8 U17.20@224.41,108.27 ; U17.1@179.92,66.93 C38.2@203.54,43.31 ; U17.20@222.44,110.24 236.22,110.24 250,96.46 250,61.02 257.87,53.15 v7@257.87,27.56
  Bottom Layer w10: C32.2@214.57,320.87 220.47,314.96 220.47,279.53 222.44,277.56 R29.2@222.44,273.62 ; C32.2@226.38,332.68 v1(226.38,368.11)
  other v7: 257.87,29.53
5V: C20.2 C23.2 C44.2 L3.2 U4.1 U4.2 U6.1 U6.3 U7.1 U7.3 | length 221.8
  Top Layer w10: v1(472.44,352.36) 472.44,322.83 488.19,307.09 L3.2@513.78,307.09
  Bottom Layer w5: C23.2@476.38,246.06 480.32,250 480.32,273.62 496.06,273.62 507.87,285.43 507.87,311.02 517.72,320.87 C44.2@517.72,324.8
  Bottom Layer w10: C44.2@509.84,330.71 U4.1@509.84,362.2 U4.1@509.84,370.08
24V: C16.2 C17.2 C18.1 D2.2 U5.A1 U5.A2 U5.C1 | length 130.9
  Bottom Layer w20: D2.2@675.2,407.48 675.2,423.23 687.01,435.04 687.01,533.46
  other v1: 653.54,545.28 681.1,561.02
ADC_2: U16.6 U16.7 U17.18 | length 1211.9
  flex_top w10: U16.7@-498.12,193.64 -494.19,231.35 v2@-494.09,232.28 ; U16.6@-478.54,191.58 v2@-474.51,228.35
  flex_bottom w10: v2(-484.25,230.31) -387.8,39.37 -346.46,39.37 -244.09,181.1 -33.46,222.44 153.54,222.44 v1(291.34,84.65)
  Bottom Layer w5: U17.18@214.57,149.61 236.22,149.61 291.34,94.49 v1(291.34,84.65)
ADC_3: U14.1 U14.2 U17.19 | length 1850.4
  flex_top w10: v2(-1190.94,133.86) -1181.1,153.54 -1180.1,153.44 -1161.42,151.57 U14.2@-1159.15,165.29
  flex_bottom w10: v2(-1190.94,133.86) -1143.7,-1.97 -1098.43,-37.4 -433.07,-108.27 -263.78,-108.27 -155.51,35.43 220.47,35.43 244.09,59.06 v1(293.31,59.06)
  Bottom Layer w5: U17.19@214.57,129.92 236.22,129.92 263.78,102.36 263.78,82.68 v1@289.37,57.09
ADC_4: U14.6 U14.7 U17.6 | length 1693.2
  flex_top w10: U14.7@-1143.81,274.46 -1137.86,312.57 v2@-1137.8,312.99 ; U14.6@-1124.31,271.72 v2@-1118.11,309.06
  flex_bottom w10: v2(-1127.95,311.02) -1104.33,228.35 -1112.2,9.84 -1090.55,-19.69 -429.13,-88.58 -275.59,-88.58 -167.32,59.06 -33.46,59.06 v1(27.56,61.02)
  Bottom Layer w5: v1(27.56,61.02) 41.34,61.02 55.12,74.8 55.12,110.24 U17.6@64.96,110.24
ADC_5: U15.1 U15.2 U17.7 | length 1120.2
  flex_top w10: v2(-877.95,86.61) -854.33,108.27 -854.14,108.25 -834.65,106.3 U15.2@-833.42,117.75
  flex_bottom w10: v2(-877.95,86.61) -704.72,-15.75 -419.29,-47.24 -297.24,-47.24 -192.91,100.39 -33.46,112.2 v1(27.56,112.2)
  Bottom Layer w5: v1(27.56,112.2) 33.46,112.2 51.18,129.92 U17.7@64.96,129.92
ADC_6: U15.6 U15.7 U17.8 | length 1190.1
  flex_top w10: U15.7@-819.98,227.17 v2@-814.96,263.78 ; U15.6@-800.44,224.77 v2@-795.48,262.02
  flex_bottom w10: v2(-805.12,263.78) -675.2,1.97 -413.39,-25.59 -309.05,-25.59 -204.72,122.05 -33.46,137.8 v1(27.56,137.8)
  Bottom Layer w5: v1@29.53,133.86 45.28,149.61 U17.8@64.96,149.61
ADC_7: U16.1 U16.2 U17.9 | length 774.1
  flex_top w10: v2(-557.09,55.12) -529.53,74.8 -511.81,72.83 U16.2@-509.64,84.01
  flex_bottom w10: v2(-557.09,55.12) -398.06,17.43 -334.65,17.72 -230.31,163.39 -4.18,192.78 v1(27.56,192.91)
  Bottom Layer w5: v1@29.53,192.91 53.15,169.29 U17.9@64.96,169.29
ADC_CS: U1.K9 U17.11 | length 152.4
  Top Layer w5: v1(84.65,320.87) U1.K9@116.14,320.87
  Bottom Layer w5: v1(84.65,320.87) 62.99,299.21 62.99,261.81 U17.11@100.39,224.41
ADC_MISO: U1.G7 U17.14 U18.28 | length 288
  Top Layer w5: v1(161.42,257.87) 169.29,250 U18.28@169.29,222.44 ; v1(163.39,399.61) 194.88,399.61 U1.G7@210.63,383.86
  flex_bottom w5: v1(161.42,257.87) 161.42,269.69 187.01,295.28 187.01,375.98 v1(163.39,399.61)
  Bottom Layer w5: U17.14@159.45,224.41 v1@159.45,257.87
ADC_MOSI: U1.H5 U17.12 U18.27 | length 492.5
  Top Layer w5: U1.H5@179.13,446.85 v1(194.88,462.6) ; v1(187.01,261.81) 188.98,250 U18.27@188.98,222.44
  flex_bottom w5: v1(84.65,275.59) 84.65,259.84 108.27,236.22 175.2,236.22 187.01,248.03 v1(187.01,261.81) 202.76,277.56 202.76,454.72 v1(194.88,462.6)
  Bottom Layer w5: v1(84.65,275.59) 84.65,265.75 102.36,248.03 112.2,248.03 120.08,240.16 U17.12@120.08,222.44
ADC_SCK: U1.H4 U17.13 U18.31 | length 373
  Top Layer w5: U18.31@110.24,222.44 v1(110.24,265.75) ; v1(163.39,494.09) U1.H4@179.13,478.35
  flex_bottom w5: v1(110.24,265.75) 110.24,440.94 v1(163.39,494.09) v1@163.39,496.06
  Bottom Layer w5: v1@112.2,263.78 125.98,250 129.92,250 139.76,240.16 U17.13@139.76,222.44
ADC_STRAIN_CS: U1.K10 U18.32 | length 135.7
  Top Layer w5: U18.32@90.55,222.44 90.55,238.19 62.99,265.75 62.99,285.43 74.8,297.24 108.27,297.24 U1.K10@116.14,289.37
EMIT_0_0: R14.1 U11.E U15.3 | length 94.4
  flex_top w10: U11.E@-856.3,39.37 -854.33,57.09 R14.1@-820.78,78.21 ; R14.1@-818.9,78.74 U15.3@-813.88,115.35
EMIT_0_1: R10.1 U8.E U14.5 | length 86
  flex_top w10: U14.5@-1104.82,268.98 -1098.43,303.15 -1098.49,304.79 U8.E@-1100.39,354.33
EMIT_1_0: R16.1 U12.E U14.3 | length 105.4
  flex_top w10: U12.E@-1181.1,88.58 -1177.17,106.3 R16.1@-1145.55,125.66 U14.3@-1137.8,175.2
EMIT_1_1: R11.1 U9.E U16.5 | length 84.5
  flex_top w5: R11.1@-454.78,225.88 R11.1@-454.72,226.38
  flex_top w10: U16.5@-458.97,189.52 R11.1@-454.78,225.88 ; U9.E@-458.66,273.62 R11.1@-454.72,226.38
EMIT_2_0: R18.1 U13.E U16.3 | length 101.1
  flex_top w10: U13.E@-527.32,-3.35 -523.62,23.62 -496.38,45.03 R18.1@-496.06,45.28 ; R18.1@-494.09,43.31 -493.99,44.33 U16.3@-490.07,81.95
EMIT_2_1: R12.1 U10.E U15.5 | length 84
  flex_top w10: U15.5@-780.9,222.37 -775.59,257.87 -775.59,303.15 U10.E@-777.56,305.12
ERASE: J1.6 U1.C5 | length 1116.9
  Top Layer w5: v1(289.37,462.6) 320.87,462.6 U1.C5@336.61,446.85 ; J1.6@395.67,-5.91 395.67,25.59 405.2,35.12 484.57,35.12 521.65,-1.97 541.34,-1.97 v1@580.71,-41.34
  flex_top w5: v1(289.37,462.6) 322.83,462.6 352.36,433.07 438.98,433.07 641.73,230.31 641.73,90.55 690.95,41.34 690.95,9.84 639.76,-41.34 v1(590.55,-41.34)